# EAGLE board WBD_01dgj (EAGLE 9.6.2)
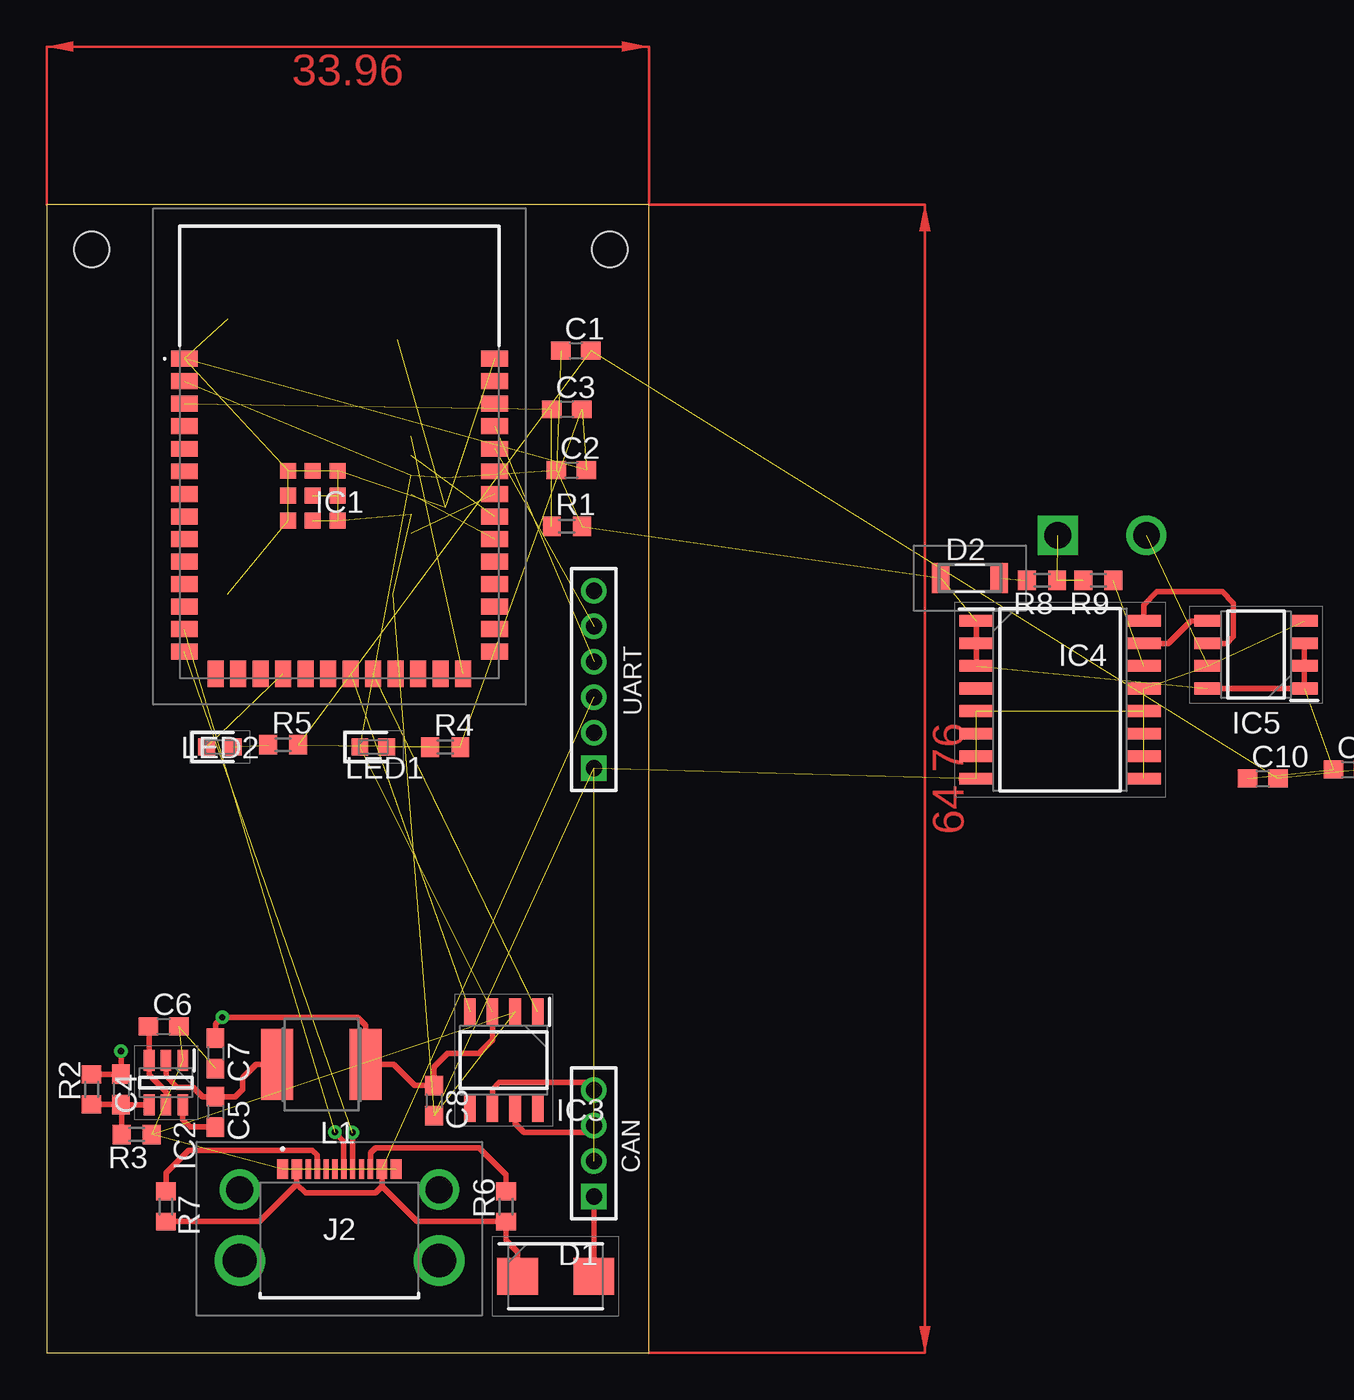
[diagram p0: board, top side]
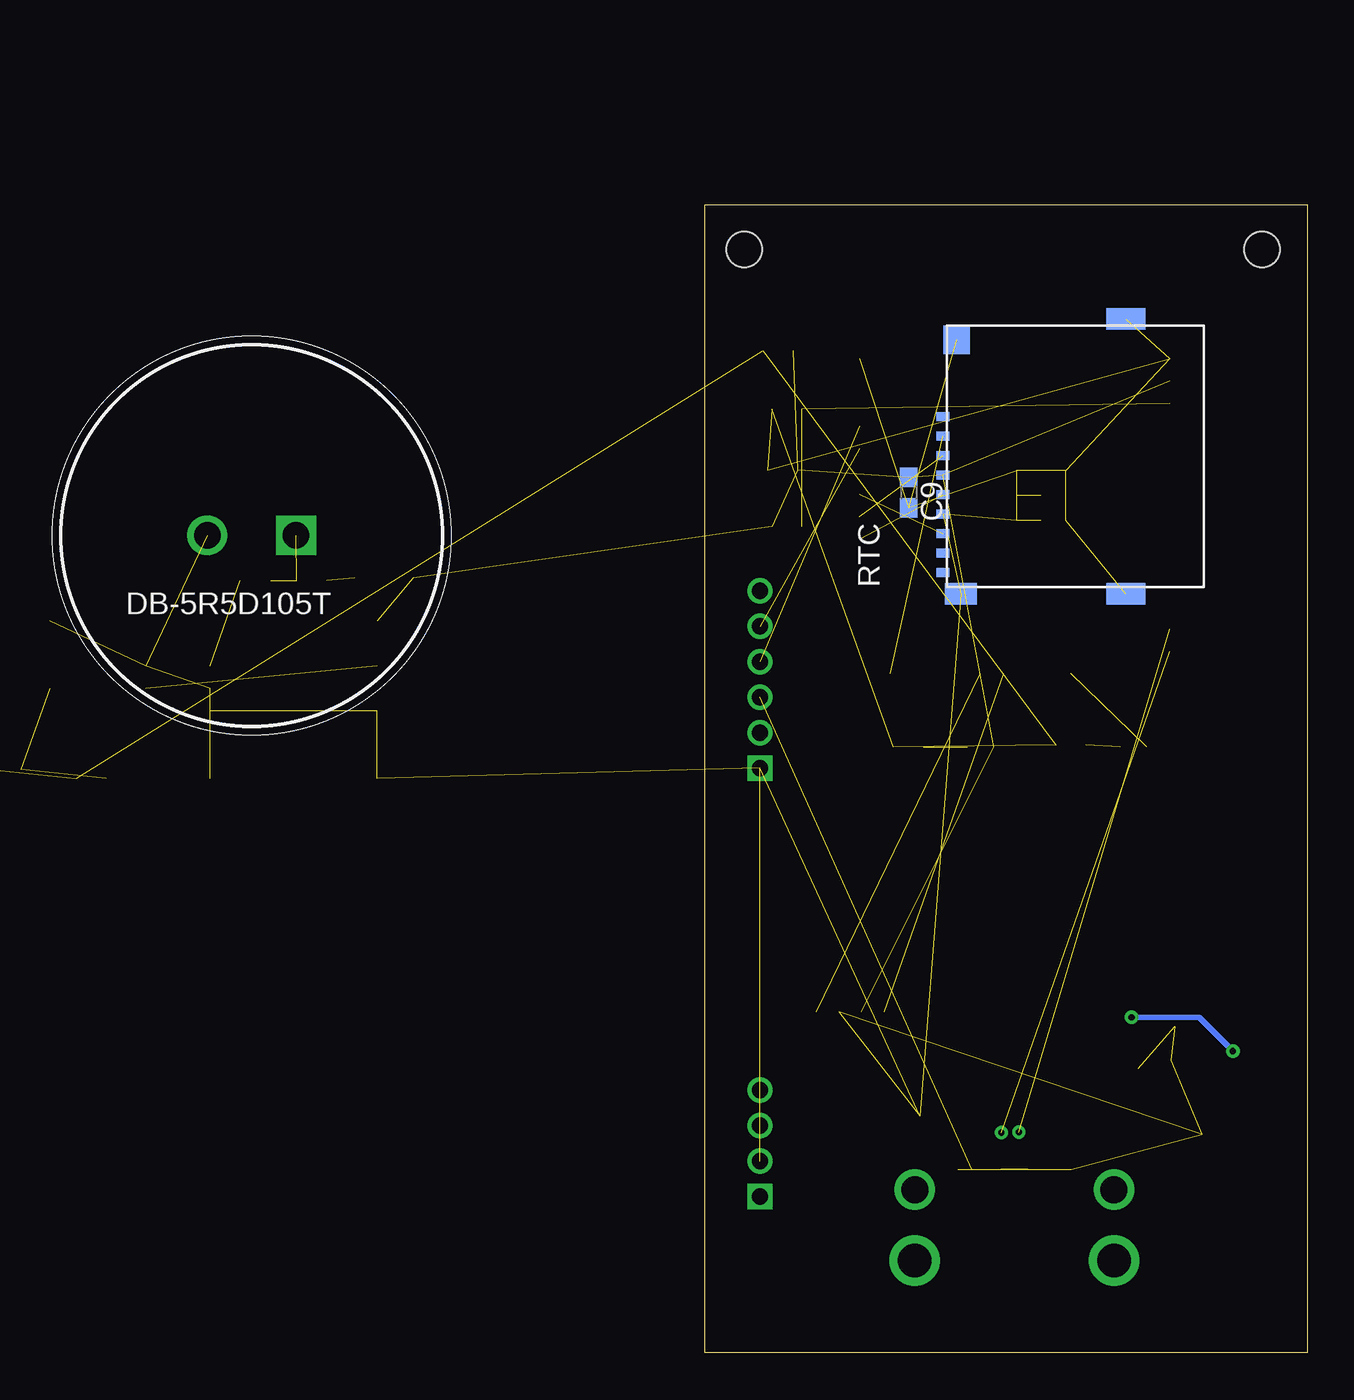
[diagram p1: board, bottom side, seen from below]

Size 33.96 x 64.76 mm. Coordinates in mm from the lower left corner, seen from the top.
Outline: 0,0 33.96,0 33.96,64.76 0,64.76 0,0
Copper layers (1*16): Top 0.035mm / dielectric 1.5mm / Bottom 0.035mm
Design rules "default": minimum track width 6mil, minimum drill 0.35mm, track to track 6mil, track to pad 6mil, pad to pad 6mil, via to via 6mil, smd to smd 6mil, copper to edge 40mil, drill to drill 6mil, minimum pad ring 10mil, minimum via ring 8mil, stop-mask expansion 4mil, vias tented up to drill 0mil, thermal gap 10mil
Holes 2 mm at 2.54,62.23 31.75,62.23

## Footprints (pad centres in the part's own frame; a part is rotated, then mirrored left to right if it is on the bottom)
C0603 = smd 1.1 x 1: 1 -0.85,0; 2 0.85,0
1X04M = drill 0.914 square: 1 -3,0 | drill 0.914: 2 -1,0; 3 1,0; 4 3,0
DIOM5336X320N = smd 2.3 x 2.1: 1 -2.15,0; 2 2.15,0
BAS85115 = smd 1 x 1.7: 1 -1.65,0; 2 1.65,0
CAPPRD500W130D2150H800 = drill 1.5 pad 2.25 square: 1 0,0 | drill 1.5 pad 2.25: 2 5,0
ESP32S3WROOM1N16 = smd 1.5 x 0.9: 1 -8.75,5.26; 2 -8.75,3.99; 3 -8.75,2.72; 4 -8.75,1.45; 5 -8.75,0.18; 6 -8.75,-1.09; 7 -8.75,-2.36; 8 -8.75,-3.63; 9 -8.75,-4.9; 10 -8.75,-6.17; 11 -8.75,-7.44; 12 -8.75,-8.71; 13 -8.75,-9.98; 14 -8.75,-11.25; 27 8.75,-11.25; 28 8.75,-9.98; 29 8.75,-8.71; 30 8.75,-7.44; 31 8.75,-6.17; 32 8.75,-4.9; 33 8.75,-3.63; 34 8.75,-2.36; 35 8.75,-1.09; 36 8.75,0.18; 37 8.75,1.45; 38 8.75,2.72; 39 8.75,3.99; 40 8.75,5.26 | smd 0.9 x 1.5: 15 -6.985,-12.5; 16 -5.715,-12.5; 17 -4.445,-12.5; 18 -3.175,-12.5; 19 -1.905,-12.5; 20 -0.635,-12.5; 21 0.635,-12.5; 22 1.905,-12.5; 23 3.175,-12.5; 24 4.445,-12.5; 25 5.715,-12.5; 26 6.985,-12.5 | smd 0.9 x 0.9: 41 -1.5,-2.46; 42 -1.5,-1.06; 43 -2.9,-1.06; 44 -2.9,-2.46; 45 -2.9,-3.86; 46 -1.5,-3.86; 47 -0.1,-3.86; 48 -0.1,-2.46; 49 -0.1,-1.06
SOT95P280X90-6N = smd 1.2 x 0.6: 1 -1.25,0.95; 2 -1.25,0; 3 -1.25,-0.95; 4 1.25,-0.95; 5 1.25,0; 6 1.25,0.95
SOIC127P600X175-8N = smd 1.528 x 0.65: 1 -2.711,1.905; 2 -2.711,0.635; 3 -2.711,-0.635; 4 -2.711,-1.905; 5 2.711,-1.905; 6 2.711,-0.635; 7 2.711,0.635; 8 2.711,1.905
SOIC127P1032X265-16N = smd 1.925 x 0.65: 1 -4.712,4.445; 2 -4.712,3.175; 3 -4.712,1.905; 4 -4.712,0.635; 5 -4.712,-0.635; 6 -4.712,-1.905; 7 -4.712,-3.175; 8 -4.712,-4.445; 9 4.712,-4.445; 10 4.712,-3.175; 11 4.712,-1.905; 12 4.712,-0.635; 13 4.712,0.635; 14 4.712,1.905; 15 4.712,3.175; 16 4.712,4.445
2169900003 = smd 0.6 x 1.1: A1 -3.2,4; A4 -2.4,4; A9 2.4,4; A12 3.2,4 | smd 0.3 x 1.1: A5 -1.25,4; A6 -0.25,4; A7 0.25,4; A8 1.25,4; B5 1.75,4; B6 0.75,4; B7 -0.75,4; B8 -1.75,4 | drill 1.52 pad 2.28: MH1 -5.62,2.85; MH4 5.62,2.85 | drill 1.9 pad 2.85: MH2 -5.62,-1.15; MH3 5.62,-1.15
L5650M = smd 1.8 x 4: 1 -2.5,0; 2 2.5,0
LEDC1608X80N = smd 0.95 x 0.95: 1 -0.75,0; 2 0.75,0
R0603 = smd 1 x 1.1: 1 -0.85,0; 2 0.85,0
MICROSD-PUSH-OUT = smd 0.5 x 0.75: 1 9.625,0.225; 2 8.525,0.225; 3 7.425,0.225; 4 6.325,0.225; 5 5.225,0.225; 6 4.125,0.225; 7 3.025,0.225; 8 1.925,0.225; CD 0.825,0.225 | smd 1.2 x 1.8: G1 -0.375,-0.8 | smd 1.2 x 2.2: G2 -0.375,-10.1; G4 15.125,-10.1 | smd 1.6 x 1.5: G3 13.95,-0.55
1X06M = drill 0.914 square: 1 -5,0 | drill 0.914: 2 -3,0; 3 -1,0; 4 1,0; 5 3,0; 6 5,0

## Placement (x,y rotation side)
C1  20uF  [C0603]  29.84,56.52 0 top
C2  0.1uF  [C0603]  29.59,49.78 0 top
C3  0.1uF  [C0603]  29.34,53.21 0 top
C4  22pF  [C0603]  4.19,14.86 270 top
C5  100nF  [C0603]  9.53,13.59 270 top
C6  10uF  [C0603]  6.6,18.41 0 top
C7  22uF  [C0603]  9.53,16.89 270 top
C8  0.1uF  [C0603]  21.84,14.22 270 top
C9  0.1uF  [C0603]  22.48,48.51 270 bottom
C10  0.1uF  [C0603]  68.58,32.38 0 top  (outside the outline)
C11  0.1uF  [C0603]  73.41,32.89 0 top  (outside the outline)
CAN  [1X04M]  30.86,11.81 90 top
D1  SS34B-HF  [DIOM5336X320N]  28.7,4.32 0 top
D2  BAS85,115  [BAS85115]  52.07,43.69 0 top  (outside the outline)
DB-5R5D105T  5V5 1F  [CAPPRD500W130D2150H800]  57.02,46.1 180 bottom  (outside the outline)
IC1  ESP32-S3-WROOM-1-N16  [ESP32S3WROOM1N16]  16.51,50.8 0 top
IC2  DIO6970TST6  [SOT95P280X90-6N]  6.73,15.24 270 top
IC3  SN65HVD232D  [SOIC127P600X175-8N]  25.78,16.51 270 top
IC4  DS3231M+TRL  [SOIC127P1032X265-16N]  57.15,36.83 0 top  (outside the outline)
IC5  AT24C32D-SSHM-B  [SOIC127P600X175-8N]  68.2,39.37 180 top  (outside the outline)
J2  216990-0003  [2169900003]  16.51,6.35 0 top
L1  4.7uH  [L5650M]  15.49,16.26 180 top
LED1  150060GS75000  [LEDC1608X80N]  18.41,34.16 0 top
LED2  150060GS75000  [LEDC1608X80N]  9.78,34.16 0 top
R1  10k  [R0603]  29.34,46.61 0 top
R2  40.2k  [R0603]  2.54,14.86 90 top
R3  13k  [R0603]  5.08,12.32 180 top
R4  330  [R0603]  22.48,34.16 0 top
R5  330  [R0603]  13.34,34.29 0 top
R6  5.1k  [R0603]  25.91,8.26 90 top
R7  5.1k  [R0603]  6.73,8.26 270 top
R8  2k2  [R0603]  56.13,43.56 180 top  (outside the outline)
R9  1k  [R0603]  59.31,43.56 180 top  (outside the outline)
RTC  MICROSD-PUSH-OUT  [MICROSD-PUSH-OUT]  20.32,43.18 90 bottom
UART  [1X06M]  30.86,37.97 90 top

## Library data of the parts
C1-C11 = rcl
CAN UART = pinhead
D1 = SamacSys_Parts; DESCRIPTION: Schottky Diodes & Rectifiers DIODE SCHOTTKY 3A 40V SMB; HEIGHT: 3.2mm; MANUFACTURER_NAME: Comchip Technology; MANUFACTURER_PART_NUMBER: SS34B-HF; MOUSER_PART_NUMBER: 750-SS34B-HF; MOUSER_PRICE-STOCK: https://www.mouser.co.uk/ProductDetail/Comchip-Technology/SS34B-HF?qs=vmHwEFxEFR9G1M%252BcUPG%2FxQ%3D%3D
D2 = SamacSys_Parts; DESCRIPTION: Schottky Diodes & Rectifiers SCHOTTKY 30V 200MA; HEIGHT: 1.6mm; MANUFACTURER_NAME: Nexperia; MANUFACTURER_PART_NUMBER: BAS85,115; MOUSER_PART_NUMBER: 771-BAS85-T/R; MOUSER_PRICE-STOCK: https://www.mouser.co.uk/ProductDetail/Nexperia/BAS85115?qs=me8TqzrmIYWCmVXtgUH2Gg%3D%3D
DB-5R5D105T = SamacSys_Parts; DESCRIPTION: Supercapacitors / Ultracapacitors MEM CAP 5.5V 1.0F; HEIGHT: 8mm; MANUFACTURER_NAME: Elna; MANUFACTURER_PART_NUMBER: DB-5R5D105T; MOUSER_PART_NUMBER: 555-DB-5R5D105T; MOUSER_PRICE-STOCK: https://www.mouser.co.uk/ProductDetail/Elna/DB-5R5D105T?qs=r8OyiFxb6Rcu1BWmqcONIQ%3D%3D
IC1 = ESP32-S3-WROOM-1-N16; DESCRIPTION: WiFi Modules - 802.11 [Engineering Samples] SMD Module, ESP32-S3, 16 MB SPI Flash, PCB Antenna; HEIGHT: 3.25mm; MANUFACTURER_NAME: Espressif Systems; MANUFACTURER_PART_NUMBER: ESP32-S3-WROOM-1-N16; MOUSER_PART_NUMBER: 356-ESP32S3WROOM1N16; MOUSER_PRICE-STOCK: https://www.mouser.co.uk/ProductDetail/Espressif-Systems/ESP32-S3-WROOM-1-N16?qs=Li%252BoUPsLEntjPrtJwwS5Pw%3D%3D
IC2 = SamacSys_Parts; DESCRIPTION: Switching Voltage Regulators 2A Step Converter 24V Input Sync; HEIGHT: 0.9mm; MANUFACTURER_NAME: DIOO Microcircuits; MANUFACTURER_PART_NUMBER: DIO6970TST6; MOUSER_PART_NUMBER: 453-DIO6970ST6; MOUSER_PRICE-STOCK: https://www.mouser.co.uk/ProductDetail/DIOO-Microcircuits/DIO6970TST6?qs=%252BEew9%252B0nqrCWpKu8WqElxA%3D%3D
IC3 = SamacSys_Parts; DESCRIPTION: CAN Transceiver 1Mbit/s ISO 11898, 8-Pin SOIC; HEIGHT: 1.75mm; MANUFACTURER_NAME: Texas Instruments; MANUFACTURER_PART_NUMBER: SN65HVD232D; MOUSER_PART_NUMBER: 595-SN65HVD232D; MOUSER_PRICE-STOCK: https://www.mouser.co.uk/ProductDetail/Texas-Instruments/SN65HVD232D?qs=QViXGNcIEAueLIS9b8IyYg%3D%3D
IC4 = SamacSys_Parts; DESCRIPTION: +/-5ppm, I2C Real-Time Clock; HEIGHT: 2.65mm; MANUFACTURER_NAME: Maxim Integrated; MANUFACTURER_PART_NUMBER: DS3231M+TRL; MOUSER_PART_NUMBER: 700-DS3231M+TRL; MOUSER_PRICE-STOCK: https://www.mouser.co.uk/ProductDetail/Maxim-Integrated/DS3231M%2bTRL?qs=Bakm8ERcljq5PBzSwLfmgg%3D%3D
IC5 = SamacSys_Parts; DESCRIPTION: AT24C32D-SSHM-B, EEPROM Memory 32kbit,, 4096 x, 8bit, Serial-2 Wire, 550ns 1.7 5.5 V, 8-Pin SOIC; HEIGHT: 1.75mm; MANUFACTURER_NAME: Microchip; MANUFACTURER_PART_NUMBER: AT24C32D-SSHM-B; MOUSER_PART_NUMBER: 556-AT24C32D-SSHM-B; MOUSER_PRICE-STOCK: https://www.mouser.co.uk/ProductDetail/Microchip-Technology-Atmel/AT24C32D-SSHM-B?qs=ZZMt4ii29sN2mTRLl%2FnVJA%3D%3D
J2 = SamacSys_Parts; DESCRIPTION: USB Connectors Mid-Mnt SMT CH0.58 16Ckt Type C Rec.; HEIGHT: 3.36mm; MANUFACTURER_NAME: Molex; MANUFACTURER_PART_NUMBER: 216990-0003; MOUSER_PART_NUMBER: 538-216990-0003; MOUSER_PRICE-STOCK: https://www.mouser.co.uk/ProductDetail/Molex/216990-0003?qs=DRkmTr78QASn0GILUGAYCA%3D%3D
L1 = rcl; SPICEPREFIX: L
LED1 LED2 = SamacSys_Parts; DESCRIPTION: Wurth Elektronik WL-SMCW 520 nm Green LED, 1608 (0603) Clear SMD package; HEIGHT: 0.8mm; MANUFACTURER_NAME: Wurth Elektronik; MANUFACTURER_PART_NUMBER: 150060GS75000; MOUSER_PART_NUMBER: 710-150060GS75000; MOUSER_PRICE-STOCK: https://www.mouser.co.uk/ProductDetail/Wurth-Elektronik/150060GS75000?qs=LlUlMxKIyB0UYkq5lDO8nA%3D%3D
R1-R9 = rcl; SPICEPREFIX: R
RTC = microsd

## Nets
+3V3: C1.1 C2.1 C4.1 C7.1 C8.1 C9.1 C10.1 C11.1 D2.1 IC1.2 IC3.3 IC4.1 IC4.2 IC4.3 IC5.1 IC5.2 IC5.3 IC5.8 L1.1 LED1.1 R1.2 R2.2 RTC.4
BS: C5.2 IC2.6
CANH: CAN.3 IC3.7
CANL: CAN.4 IC3.6
CANRX: IC1.21 IC3.4
CANTX: IC1.22 IC3.1
CC1: J2.A5 R7.1
CC2: J2.B5 R6.2
EN: C3.1 IC1.3 R1.1
FB: C4.2 IC2.4 R2.1 R3.2
GND: C1.2 C2.2 C3.2 C6.2 C7.2 C8.2 C9.2 C10.2 C11.2 CAN.2 DB-5R5D105T.2 IC1.1 IC1.40 IC1.41 IC1.42 IC1.43 IC1.44 IC1.45 IC1.46 IC1.47 IC1.48 IC1.49 IC2.1 IC3.2 IC4.5 IC4.6 IC4.7 IC4.8 IC4.9 IC4.10 IC4.11 IC4.12 IC4.13 IC5.4 IC5.7 J2.A1 J2.A12 R3.1 R4.2 R5.2 RTC.6 RTC.G1 RTC.G2 RTC.G3 RTC.G4 UART.1
LDR1: LED1.2 R4.1
LDR2: LED2.2 R5.1
LED2: IC1.18 LED2.1
MTCK: IC1.32 RTC.5
MTDI: IC1.34 RTC.7
MTDO: IC1.33 RTC.3
RTCBAT: DB-5R5D105T.1 R8.1 R9.2
RTCD: D2.2 R8.2
RX: IC1.36 UART.5
SCL: IC4.16 IC5.6
SDA: IC4.15 IC5.5
SDCARD: IC1.26 RTC.2
SW: C5.1 IC2.2 L1.2
TX: IC1.37 UART.4
USBD+: IC1.14 J2.A6 J2.B6
USBD-: IC1.13 J2.A7 J2.B7
VBAT: IC4.14 R9.1
VCC: D1.1 J2.A4 J2.A9 R6.1 R7.2 UART.3
VEXT: CAN.1 D1.2
VIN: C6.1 IC2.3 IC2.5

## Tracks (layer width: path | path; a pad name or v marks a point on that pad's centre or on a via)
+3V3  (via drill 0.35)  (12 unrouted)
  Top 0.305: IC5.3 IC5.2 IC5.1 IC5.8 | IC4.3 IC4.2 IC4.1 | R2.2 C4.1 v4.19,17.02 | IC3.3 25.15,17.65 24.38,16.89 22.61,16.89 21.84,16.13 C8.1 20.74,15.07 19.56,16.26 L1.1 17.99,18.45 17.53,18.92 v9.91,18.92 9.53,18.54 C7.1
  Bottom 0.305: v4.19,17.02 6.1,18.92 v9.91,18.92
BS
  Top 0.305: 9.49,12.74 C5.2 8.09,12.74 7.68,13.15 IC2.6
CANH
  Top 0.305: CAN.3 30.5,12.45 26.92,12.45 26.42,12.95 IC3.7
CANL
  Top 0.305: CAN.4 30.43,15.24 25.53,15.24 25.15,14.86 IC3.6
CANRX  (1 unrouted)
CANTX  (1 unrouted)
CC1
  Top 0.305: J2.A5 15.26,11.16 14.99,11.43 8,11.43 6.73,10.16 R7.1
CC2
  Top 0.305: J2.B5 18.26,11.28 18.54,11.56 24.38,11.56 25.91,10.03 R6.2
EN  (2 unrouted)
FB
  Top 0.305: IC2.4 4.21,13.99 C4.2 | C4.2 R2.1 | C4.2 4.23,13.97 R3.2
GND  (45 unrouted)
LDR1  (1 unrouted)
LDR2  (1 unrouted)
LED2  (1 unrouted)
MTCK  (1 unrouted)
MTDI  (1 unrouted)
MTDO  (1 unrouted)
RTCBAT  (2 unrouted)
RTCD  (1 unrouted)
RX  (1 unrouted)
SCL
  Top 0.305: IC4.16 61.86,42.18 62.61,42.93 66.29,42.93 66.93,42.29 66.93,40.39 66.55,40.01 IC5.6
SDA
  Top 0.305: IC4.15 63.25,40.01 64.52,41.27 IC5.5
SDCARD  (1 unrouted)
SW
  Top 0.305: IC2.2 6.73,15.62 7.37,14.99 8.26,14.99 8.8,14.44 C5.1 10.63,14.44 11.05,14.86 11.05,15.49 11.81,16.26 L1.2
TX  (1 unrouted)
USBD+  (via drill 0.35)  (2 unrouted)
  Top 0.305: J2.B6 17.26,12.41 v17.25,12.42
USBD-  (via drill 0.35)  (2 unrouted)
  Top 0.305: J2.A7 16.76,11.94 v16.26,12.45
VBAT  (1 unrouted)
VCC  (1 unrouted)
  Top 0.305: J2.A9 18.91,9.38 | 18.91,9.38 18.54,9.02 14.61,9.02 14.11,9.51 | J2.A4 14.11,9.51 | 18.91,9.38 20.89,7.41 R6.1 25.91,6.35 26.55,5.71 D1.1 | 14.11,9.51 12,7.41 R7.2
VEXT
  Top 0.305: CAN.1 30.86,4.33 D1.2
VIN
  Top 0.305: IC2.5 6.73,14.73 5.78,15.68 IC2.3 5.78,18.39 C6.1
(copper drawn outside any net)
  shapes: Top area x2